# Altium PCB 5602_PCB_SHEET.PcbDoc (part 1 of 2)
Units mm, origin at the board's own origin, x right, y up, seen from the top; angles counter-clockwise.
Board outline 104.86 x 35.66 mm, 2 copper layers (Top Layer, Bottom Layer); 111 components, 84 nets, 367 pads, 137 vias.
Unrouted connection lines stored in the file: 5.
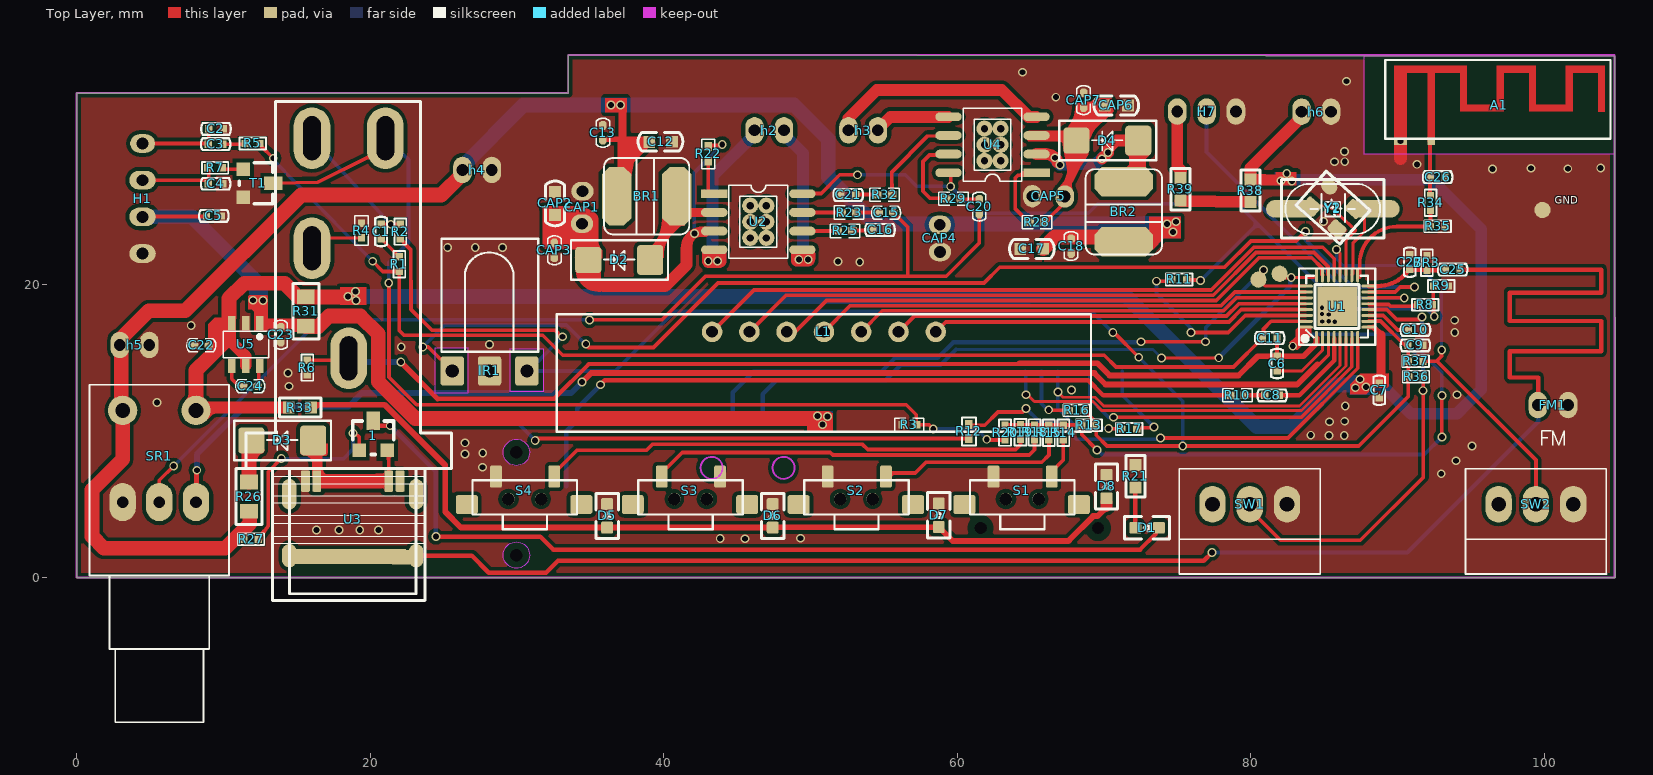
[diagram p0: Top Layer view]
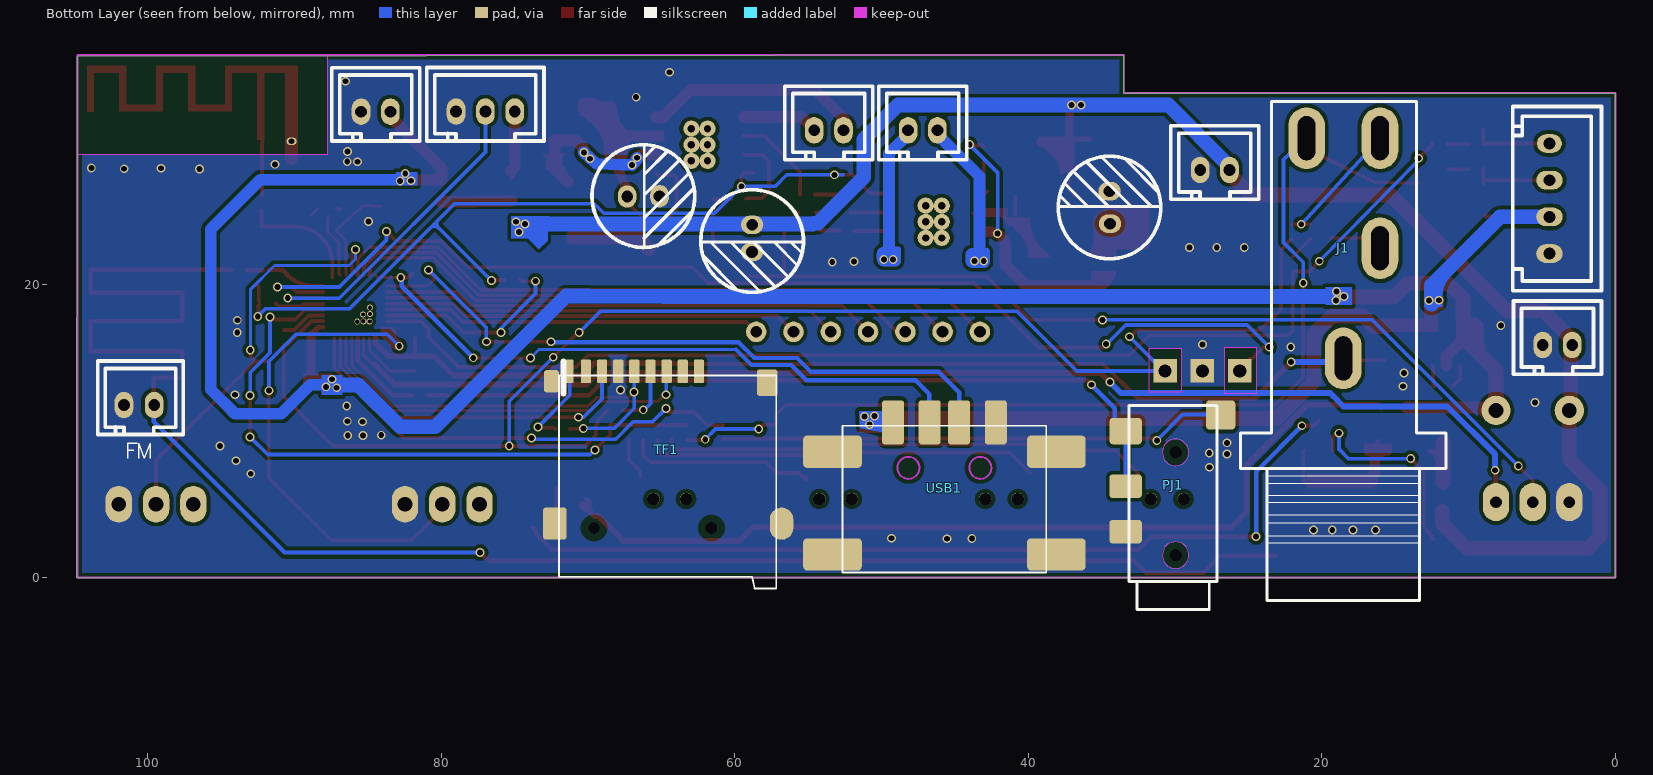
[diagram p1: Bottom Layer view, seen from below]

## Layer stack, top to bottom
Top Solder: solder mask 0.0102, Solder Resist, Dk 3.5
Top Layer: signal copper 0.0356
Dielectric 1: dielectric 0.32, FR-4, Dk 4.8
Bottom Layer: signal copper 0.0356
Bottom Solder: solder mask 0.0102, Solder Resist, Dk 3.5

## Board outline
0,0 104.86,0 104.809,35.557 33.507,35.661 33.507,33.037 0,33.037

## Design rules (kind name [scope] priority, off if disabled: settings)
Clearance [All] p1: gap=0.254 ignorepadtopadclearanceinfootprint=FALSE except(0: Arc-Hole Track-Hole SMDPad-Hole THPad-Hole Via-Hole Fill-Hole Poly-Hole Region-Hole Text-Hole; 0.1: Arc-Arc Arc-Track Arc-SMDPad Arc-Via Track-Track Track-SMDPad Track-Via SMDPad-SMDPad; 0.5: Arc-Text Track-Text)
PolygonConnect [All] p1: connectstyle=Direct reliefconductorwidth=0.254 reliefentries=4 polygonreliefangle="90 Angle" airgapwidth=0.254
RoutingVias [All] p1: holewidth=0.711 width=1.27 viastyle="Through Hole" minholewidth=0.711 minwidth=1.27 maxholewidth=0.711 maxwidth=1.27
SolderMaskExpansion [All] p1: expansion=0.102
Width [All] p1: maxlimit=0.254 minlimit=0.1 preferedwidth=0.2
30 further rules are at their usual default settings.

## Classes and differential pairs
component class Sheet3: h6 H7 IR1 R36 R37 R38 R39 SW1 SW2
component class Sheet1: C1 C2 C3 C4 C5 C6 C7 C8 C9 C10 C11 H1 J1 L1 PJ1 R1 R2 R3 R4 R5 R6 R7 R8 R9 R10 R11 R12 R13 R14 R15 R16 R17 R18 R19 R20 S1 S2 S3 S4 T1 TF1 U1 USB1
component class AC5602: 1 A1 BR1 BR2 BR3 C12 C13 C15 C16 C17 C18 C20 C21 C22 C23 C24 C25 C26 C27 CAP1 CAP2 CAP3 CAP4 CAP5 CAP6 CAP7 D1 D2 D3 D4 D5 D6 D7 D8 FM1 h2 h3 h4 h5 R21 R22 R23 R25 R26 R27 R28 R29 R31 R32 R33 R34 R35 SR1 U2 U3 U4 U5 Y1 Y2

## Components (designator, comment, footprint, x,y, rotation, side; value= is the part's Value field where it differs from the comment)
1 "TRANSISTOR2" TRANSISOTR 19.308,8.678 r90 top
A1 "BT_antenna" Antenna 90.215,29.831 r0 top
BR1 "3R3" 3R3 40.926,26.285 r180 top
BR2 "3R3" 3R3 71.083,27.02 r270 top
BR3 "180nH" IND_180NH 92.013,20.974 r90 top
C1 "220nF" "CAP 220NF" 20.8,23.579 r90 top
C2 "10nf" "CAP 10NF" 9.5,30.6 r180 top
C3 "220nF" "CAP 220NF" 9.5,29.6 r180 top
C4 "100nF" "CAP 220NF" 9.5,26.9 r180 top
C5 "1uF" "CAPM 1UF" 9.331,24.621 r0 top
C6 "1uF" "CAP 10nF" 81.805,14.607 r90 top
C7 "1uF" "CAP 10nF" 88.765,12.785 r270 top
C8 "1uF" "CAPM 1UF" 81.494,12.485 r180 top
C9 "1uF" "CAP 10nF" 91.225,15.849 r180 top
C10 "1uF" "CAP 10nF" 91.23,16.894 r180 top
C11 "10uF" "CAP 10nF" 81.3,16.335 r180 top
C12 "10uf" CAPB_10UF 40.573,29.722 r180 top
C13 "10uF" "CAP 10UF" 35.864,30.343 r270 top
C15 "100nF" "cap or" 55.153,24.88 r0 top
C16 "100nF" "CAP 100NF" 54.726,23.674 r0 top
C17 "10uf" CAPB_10UF 64.31,22.411 r0 top
C18 "10uF" "CAP 10UF" 67.767,22.607 r90 top
C20 "100nF" "cap or" 61.509,25.312 r270 top
C21 "100nF" "CAP 100NF" 52.607,26.144 r180 top
C22 "10uF" "CAP 10UF" 8.5,15.841 r0 top
C23 "10uF" "CAP 10UF" 13.924,16.562 r90 top
C24 "10uF" "CAP 10UF" 11.829,13.065 r0 top
C25 "56pF" "CAPM 1UF" 93.747,20.966 r0 top
C26 "NC" "CAP 10NF" 92.742,27.302 r180 top
C27 "NC" "CAP 10NF" 90.844,21.514 r270 top
CAP1 "CAP_470uF" CAP_10V 34.468,26.348 r270 top
CAP2 "10uF" CAPL_10uF 32.605,26.303 r270 top
CAP3 "1uF" CAPL_1uF 32.596,21.763 r90 top
CAP4 "CAP_470uF" CAP_16V 58.825,23.934 r0 top
CAP5 "CAP_470uF" CAP_10V 65.134,26.012 r0 top
CAP6 "10uF" CAPL_10uF 71.637,32.189 r180 top
CAP7 "1uF" CAPL_1uF 68.584,33.12 r270 top
D1 "RED LED" LED 72.949,3.415 r180 top
D2 "SS54" DIODE/SS54 34.765,21.557 r0 top
D3 "SS54" DIODE/SS54 11.805,9.262 r0 top
D4 "SS54" DIODE/SS54 68.024,29.695 r0 top
D5 "LED" LED 36.153,4.226 r90 top
D6 "LED" LED 47.436,4.226 r90 top
D7 "LED" LED 58.752,4.272 r90 top
D8 "LED" LED 70.181,6.229 r90 top
FM1 "FM" FM 99.568,11.775 r0 top
H1 "HEADER" HEADER4 4.5,29.6 r0 top
h2 "HEADER/2mm" HEADER2 46.2,30.5 r0 top
h3 "HEADER/2mm" HEADER2 52.6,30.5 r0 top
h4 "HEADER/2mm" HEADER2 26.3,27.8 r0 top
h5 "HEADER/2mm" HEADER2 2.953,15.875 r0 top
h6 "HEADER/2mm" Header2 83.473,31.768 r0 top
H7 "HEADER" HEADER3 75.001,31.773 r0 top
IR1 "IR sensor" "IR SENSOR" 28.14,14.1 r0 top
J1 "MIC Jack" MIC 21.044,29.961 r180 bottom
L1 "LED_DISPLAY_3308" LED_DISPLAY_3308 56.007,16.764 r0 top
PJ1 "AUX Jack" AUX 33.373,6.251 r0 bottom
R1 "4.7K" R_4.7K 21.994,21.381 r90 top
R2 "22K" R_22K 22.064,23.598 r270 top
R3 "NC" R_NC 56.743,10.444 r0 top
R4 "NC" R_NC 19.418,23.671 r270 top
R5 "4.7K" R_4.7K 12,29.6 r180 top
R6 "0R" R_0 15.73,14.332 r90 top
R7 "6k8" R_22K 9.439,27.937 r180 top
R8 "91K" R_22K 91.897,18.617 r0 top
R9 "68K" R_22K 92.985,19.894 r180 top
R10 "10K" R_10K 79.096,12.442 r0 top
R11 "3K3" R_100K 75.64,20.334 r180 top
R12 "1K" "R_1K SECOND" 60.815,9.523 r90 top
R13 "22K" R_22K 68.982,10.399 r180 top
R14 "0R" R_0 67.238,9.893 r270 top
R15 "27K" R_27K 66.255,9.399 r90 top
R16 "4.7K" R_4.7K 68.162,11.412 r180 top
R17 "3K3" R_100K 72.233,10.149 r180 top
R18 "6K2" R_6K2 65.278,9.415 r90 top
R19 "3K3" R_100K 64.317,9.428 r90 top
R20 "100K" R_100K 63.266,9.401 r90 top
R21 "1K" R_1K 72.155,6.917 r270 top
R22 "820K" R_820K 43.176,29.515 r270 top
R23 "10K" R_10K 52.636,24.891 r180 top
R25 "10K" R_10K 52.364,23.641 r180 top
R26 "1R" R_1R 11.75,4.534 r90 top
R27 "22K" R_22K 11.891,2.63 r0 top
R28 "820K" R_820K 66.06,24.108 r180 top
R29 "10K" R_10K 59.751,25.828 r180 top
R31 "1R" R_1R 15.628,17.153 r90 top
R32 "10K" R_10K 55.058,26.117 r0 top
R33 "1K" R_1K 15.22,11.602 r180 top
R34 "2.7P" R_2.7P 92.262,25.053 r90 top
R35 "NC" RES_NC 92.256,23.949 r0 top
R36 "4.7K" R_22K 91.271,13.711 r0 top
R37 "4.7K" R_22K 91.249,14.769 r180 top
R38 "22K" R_22R 79.861,25.619 r90 top
R39 "22K" R_22R 75.346,27.247 r270 top
S1 "Teak switch" "TEAK SWITCH" 64.4,5.95 r180 top
S2 "Teak switch" "TEAK SWITCH" 53.1,5.95 r180 top
S3 "Teak switch" "TEAK SWITCH" 41.8,5.95 r180 top
S4 "Teak switch" "TEAK SWITCH" 30.5,5.95 r180 top
SR1 "B50" VR50K 5.64,5.162 r0 top
SW1 "B50KS" VR2/50K 79.94,5.02 r0 top
SW2 "B50KS" VR2/50K 99.44,5.02 r0 top
T1 "Transistor" TRANSISOTR 11.36,27.811 r0 top
TF1 "TF" "SD CARD" 61.6,3.4 r0 bottom
U1 "AC6966" AC6966 86.8,18.5 r90 top
U2 "XA9812B" XA9812B 45.906,25.366 r0 top
U3 "USB -C" "USB C" 18.673,2.936 r0 top
U4 "XA9812B" XA9812B 62.965,28.414 r180 top
U5 "ic4004" IC4004 11.47,16.091 r0 top
USB1 "USB A" "USB A" 53.35,1.6 r0 bottom
Y1 "24MHz" OSC 85.6,25.148 r180 top
Y2 "24MHz" OSC1 85.617,25.223 r180 top

## Footprints (in the part's own frame and the unit in brackets; to place one, negate y for a bottom-side part, rotate by r counter-clockwise, add the part's x,y. Pads: shape width x height; smd on the part's side, far side on the other; paste and mask are expansions set on the pad)
3R3 [mm] "3R3 INDUCTOR"
  oct 2x4 smd paste-2539.97 mask+0.02: 1(0.026,0.275)
  oct 2x4 smd paste+0 mask+0.02: 2(4.126,0.275)
  silkscreen extent -0.82,-2.33 4.98,2.88
AC6966 [mm] "AC6966 MPU"
  rect 2.7x2.7 smd paste+0 mask+0.102: 0(0,0.889)
  oval 1x0.2 smd paste+0 mask+0.102: 1(-2.168,2.306) 2(-2.168,1.906) 3(-2.168,1.506) 4(-2.168,1.107) 5(-2.168,0.706) 6(-2.168,0.306) 7(-2.168,-0.094) 8(-2.168,-0.494) 17(2.132,-0.494) 18(2.132,-0.094) 19(2.132,0.306) 20(2.132,0.706) 21(2.132,1.107) 22(2.132,1.506) 23(2.132,1.906) 24(2.132,2.306)
  oval 0.2x1 smd paste+0 mask+0.102: 9(-1.418,-1.244) 10(-1.018,-1.244) 11(-0.618,-1.244) 12(-0.218,-1.244) 13(0.182,-1.244) 14(0.582,-1.244) 15(0.982,-1.244) 16(1.382,-1.244) 25(1.382,3.056) 26(0.982,3.056) 27(0.582,3.056) 28(0.182,3.056) 29(-0.218,3.056) 30(-0.618,3.056) 31(-1.018,3.056) 32(-1.418,3.056)
  silkscreen extent -2.62,-1.69 2.58,3.51
Antenna [mm]
  rect 0.5x0.5 smd mask+0.003: 1(2.089,-0.077)
  oval 0.7x0.5 hole 0.4 mask+0.01: 2(-0.011,-0.077)
  rect 0.9x0.5 smd mask+0.003: 2(-0.011,-0.077)
  rect 0.9x0.5 on Top Solder mask+0.003: 2(-0.011,-0.077)
  rect 0.5x0.5 on Top Solder mask+0: ""(-0.211,4.823)
  rect 0.5x0.5 on Top Solder mask+0.003: ""(2.089,-0.077) ""(2.089,4.323) ""(4.289,2.183) ""(4.289,4.823) ""(6.789,4.823) ""(6.789,2.183) ""(8.989,2.183) ""(8.989,4.823) ""(11.489,2.183) ""(11.489,4.823) ""(13.689,0.883) ""(13.689,4.823)
  Top Layer region: 9.239,1.933 9.239,5.073 8.739,5.073 8.739,1.933
  Top Layer region: 9.239,4.573 9.239,5.073 6.538,5.073 6.538,4.573
  Top Layer region: 7.039,1.933 7.039,5.073 6.538,5.073 6.538,1.933
  Top Layer region: 7.04,1.933 7.04,2.433 4.039,2.433 4.039,1.933
  Top Layer region: 0.44,-0.326 0.44,5.074 -0.459,5.074 -0.459,-0.326
  Top Layer region: 2.339,0.016 2.339,4.823 1.838,4.823 1.838,0.016
  Top Layer region: 4.539,1.934 4.539,5.074 4.039,5.074 4.039,1.934
  Top Layer region: 11.74,1.933 11.74,5.073 11.24,5.073 11.24,1.933
  Top Layer region: 9.038,2.433 9.038,1.933 11.739,1.933 11.739,2.433
  Top Layer region: 13.939,4.574 13.939,5.074 11.239,5.074 11.239,4.574
  Top Layer region: 13.939,1.905 13.939,5.073 13.439,5.073 13.439,1.905
  Top Layer lines w0.5: -0.211,4.823 -0.009,4.823 4.289,4.823 ; 4.289,4.823 4.289,4.823 ; 4.289,4.823 4.289,4.823
  Keep-Out Layer pour cut-out: -2.473,5.75 14.605,5.75 14.605,-0.94 14.579,-0.965 -2.464,-0.965 -2.464,5.74
  silkscreen extent -1.04,0.1 14.31,5.45
AUX [mm] "AUX, 3.5MM"
  round 0.2 hole 0.85 unplated: 0(-3.4,-2.3) 0(-3.4,4.7)
  rrect25% 2.2x1.6 smd: 1(0,0) 4(0,3.1)
  rrect25% 2.2x1.8 smd: 2(0,-3.75)
  rrect25% 2x2 smd: 3(-6.473,-4.849)
  Keep-Out Layer pour cut-out: -4.3,-2.3 -4.231,-2.644 -4.036,-2.936 -3.744,-3.131 -3.4,-3.2 -3.4,-3.2 -3.056,-3.131 -2.764,-2.936 -2.569,-2.644 -2.5,-2.3 -2.5,-2.3 -2.569,-1.956 -2.764,-1.664 -3.056,-1.469 -3.4,-1.4 -3.4,-1.4 -3.744,-1.469 -4.036,-1.664 -4.231,-1.956 -4.3,-2.3
  Keep-Out Layer pour cut-out: -4.3,4.7 -4.231,4.356 -4.036,4.064 -3.744,3.869 -3.4,3.8 -3.4,3.8 -3.056,3.869 -2.764,4.064 -2.569,4.356 -2.5,4.7 -2.5,4.7 -2.569,5.044 -2.764,5.336 -3.056,5.531 -3.4,5.6 -3.4,5.6 -3.744,5.531 -4.036,5.336 -4.231,5.044 -4.3,4.7
  silkscreen extent -6.24,-5.5 -0.24,8.4
"CAP 10NF" [mm] "10nF SMD Capacitor"
  rect 0.5x0.5 smd paste+0 mask+0.102: 1(-0.5,0) 2(0.5,0)
  silkscreen extent -1.01,-0.4 1,0.4
"CAP 10nF" [mm] "10nF SMD Capacitor"
  rect 0.5x0.5 smd paste+0 mask+0.102: 1(-0.5,0) 2(0.5,0)
  silkscreen extent -1.01,-0.4 1,0.4
"CAP 10UF" [mm] "10uF SMD Capacitor"
  oct 0.6x0.51 smd paste+0 mask+0.102: 1(-0.492,0.003) 2(0.508,0.003)
  silkscreen extent -0.98,-0.45 0.99,0.45
"CAP 100NF" [mm] "100nF SMD Capcitor"
  rect 0.5x0.5 smd paste+0 mask+0.102: 1(-0.476,0.044) 2(0.524,0.044)
  silkscreen extent -0.98,-0.36 1.03,0.44
"CAP 220NF" [mm] "220nF Capacitor"
  rect 0.5x0.5 smd paste+0 mask+0.102: 1(-0.476,0.044) 2(0.524,0.044)
  silkscreen extent -0.98,-0.36 1.03,0.44
"cap or" [mm]
  oct 0.6x0.51 smd paste+0 mask+0.102: 1(-0.492,0.003) 2(0.508,0.003)
  silkscreen extent -0.98,-0.45 0.99,0.45
CAP_10V [mil]
  oval 50x60 hole 31.5 mask+4: 1(0,0) 2(87,-1.06)
CAP_16V [mil]
  oval 60x50 hole 31.5 mask+4: 1(0,5) 2(0.31,-67.86)
CAPB_10UF [mm] "CAPB 10UF"
  rect 0.8x0.8 smd: 1(0,0) 2(1.557,0.021)
  silkscreen extent -0.74,-0.64 2.31,0.64
CAPL_1uF [mm]
  oct 0.6x0.51 smd paste+0 mask+0.102: 1(0.062,0.034) 2(1.063,0.034)
  silkscreen extent -0.42,-0.42 1.55,0.48
CAPL_10uF [mil]
  rect 32x32 smd paste+0 mask+4: 1(0,0) 2(62,0)
  silkscreen extent -29,-25 91,25
"CAPM 1UF" [mm] "1uF SMD Capacitor mc"
  rect 0.5x0.5 smd paste+0 mask+0.102: 1(-0.476,0.044) 2(0.524,0.044)
  silkscreen extent -0.98,-0.36 1.03,0.44
DIODE/SS54 [mil]
  rrect25% 70x70 smd: 1(4.12,4.12)
  rrect25% 70x80 smd: 2(170.11,4.12)
  silkscreen extent -42,-49 218,57
FM [mil] "FM"
  oval 50x70.87 hole 31.5 mask+4: 1(0,0) 2(81.1,0)
  silkscreen extent 11,-108 71,-68
HEADER2 [mil]
  oval 50x70.87 hole 31.5 mask+4: 1(0,0) 2(78.74,0)
Header2 [mil]
  oval 50x70.87 hole 31.5 mask+4: 1(0,0) 2(78.74,0)
HEADER3 [mil]
  oval 50x70.87 hole 31.5 mask+4: 1(157.48,0) 2(78.74,0) 3(0,0)
HEADER4 [mil] "2.5mm"
  oval 66.93x50 hole 31.5: 1(0,0)
  oval 70.87x50 hole 31.5: 2(0,-98.42) 3(0,-196.86) 4(0,-295.27)
IC4004 [mm] "ic4004"
  rect 0.5x1 smd paste+0 mask+0.102: 1(-0.889,1.27) 2(0.061,1.27) 3(1.011,1.27) 4(-0.889,-1.63) 5(0.061,-1.63) 6(1.011,-1.63)
  silkscreen extent -1.49,-1.08 1.61,0.72
IND_180NH [mm] "180nH Inductor"
  rect 0.5x0.5 smd: 1(0,0) 2(1,0)
  silkscreen extent -0.4,-0.4 1.4,0.4
"IR SENSOR" [mm]
  rrect25% 1.6x2 / inner round 1.524 / far side rrect0% 1.6x1.6 hole 0.889: 1(-2.54,0) 2(0,0) 3(2.54,0)
  Keep-Out Layer pour cut-out: 1.41,1.5 3.67,1.5 3.67,-1.43 1.41,-1.43 1.41,1.5
  Keep-Out Layer pour cut-out: -3.71,1.57 -1.47,1.57 -1.47,-1.53 -3.71,-1.53 -3.71,1.57
  silkscreen extent -3.27,1.31 3.33,9.01
LED [mil]
  rrect25% 32x32 smd: 1(-31.5,0) 2(31.5,0)
  silkscreen extent -61,-30 61,30
LED_DISPLAY_3308 [mil]
  round 55.12 hole 31.5 mask+4: 1(-500,0) 2(-400,0) 3(-300,0) 4(-200,0) 5(-100,0) 6(0,0) 7(100,0)
  silkscreen extent -917,-268 517,47
MIC [mm]
  oval 2.5x4.2 hole 1.2 slot 3 at 90 deg: 1(5,0) 2(0,0) 3(5,-7.5) 4(2.5,-15)
  silkscreen extent -4.5,-31.51 9.5,2.5
OSC [mm]
  oval 3.5x1.2 smd: 1(-2.8,0) 2(2.8,0)
  silkscreen extent -3.5,-2 3.5,2
OSC1 [mil]
  rrect25% 45x38 smd rot 138.37 mask+1.12: 1(-57.38,3.6) 3(57.38,-3.6)
  oval 45x38 smd rot 138.37 mask+1.12: 2(10.3,-56.56)
  rrect50% 45x38 smd rot 138.37 mask+1.12: 4(-10.3,56.56)
  silkscreen extent -99,-98 99,98
R_0 [mm] "0R SMD Resistance"
  rect 0.5x0.5 smd paste+0 mask+0.102: 1(-0.5,0) 2(0.5,0)
  silkscreen extent -0.9,-0.4 0.9,0.4
R_1K [mil] "1K SMD Resistance"
  rect 32x32 smd paste+0 mask+4: 1(-30,0) 2(30,0)
  silkscreen extent -56,-26 55,26
"R_1K SECOND" [mm]
  rect 0.6x0.51 smd paste+0 mask+0.102: 1(-0.022,0.012) 2(0.928,0.012)
  silkscreen extent -0.5,-0.47 1.4,0.49
R_1R [mm]
  rect 1x1.2 smd paste+0 mask+0.102: 1(0,0) 2(2,0)
  silkscreen extent -0.89,-0.89 2.92,0.89
R_2.7P [mm] "2.7P SMD Resistance"
  rect 0.5x0.5 smd paste+0 mask+0.102: 1(0,0) 2(1,0)
  silkscreen extent -0.4,-0.4 1.4,0.4
R_4.7K [mm] "4.7K SMD Resistance3"
  rect 0.5x0.5 smd paste+0 mask+0.102: 1(-0.5,0) 2(0.5,0)
  silkscreen extent -0.9,-0.4 0.9,0.4
R_6K2 [mm] "6K2 SMD Resistance"
  rect 0.5x0.5 smd paste+0 mask+0.102: 1(0,0) 2(1,0)
  silkscreen extent -0.4,-0.4 1.4,0.4
R_10K [mm] "10K SMD Resistance"
  rect 0.6x0.51 smd paste+0 mask+0.102: 1(-0.5,0) 2(0.5,0)
  silkscreen extent -1,-0.45 1,0.45
R_22K [mm] "22K SMD Resistance"
  rect 0.5x0.5 smd paste+0 mask+0.102: 1(-0.5,0) 2(0.5,0)
  silkscreen extent -0.9,-0.4 0.9,0.4
R_22R [mil] "22R SMD Resistence"
  rect 32x32 smd paste+0 mask+4: 1(0,-5) 2(60,-5)
  silkscreen extent -25,-31 86,21
R_27K [mm] "27K SMD Resistance"
  rect 0.5x0.5 smd paste+0 mask+0.102: 1(0,0) 2(1,0)
  silkscreen extent -0.4,-0.4 1.4,0.4
R_100K [mm] "100K SMD Resistance"
  rect 0.5x0.5 smd paste+0 mask+0.102: 1(0,0) 2(1,0)
  silkscreen extent -0.4,-0.4 1.4,0.4
R_820K [mil] "820K SMD Resistance"
  rect 23.62x20.08 smd paste+0 mask+4: 1(5,-5) 2(44.38,-5)
  silkscreen extent -15,-23 64,13
R_NC [mm] "NC 1mm"
  rect 0.5x0.5 smd paste+0 mask+0.102: 1(-0.5,0) 2(0.5,0)
  silkscreen extent -1,-0.45 1,0.45
RES_NC [mm] "RESISTOR nc 1MM"
  rect 0.5x0.5 smd paste+0 mask+0.102: 1(0,0) 2(1,0)
  silkscreen extent -0.4,-0.4 1.4,0.4
"SD CARD" [mm]
  round 0.5 hole 0.85 unplated: 0(0,0) 0(8.001,0)
  rrect25% 0.7x1.6 smd: 1(0.852,-10.668) 2(1.953,-10.666) 3(3.052,-10.668) 4(4.152,-10.668) 5(5.252,-10.668) 6(6.352,-10.668) 7(7.452,-10.668) 8(8.552,-10.668)
  rrect25% 0.5x1.6 smd: 9(9.652,-10.668)
  rrect25% 1x1.5 smd: 10(10.9,-10)
  rrect25% 1.6x2.2 smd: 13(10.672,-0.3)
  oval 1.6x2.2 smd: 14(-4.778,-0.3)
  rrect25% 1.4x1.8 smd: 15(-3.8,-9.9)
  Top Layer pour cut-out: 7.101,0 7.17,-0.344 7.365,-0.636 7.657,-0.831 8.001,-0.9 8.001,-0.9 8.345,-0.831 8.637,-0.636 8.833,-0.344 8.901,0 8.901,0 8.833,0.344 8.637,0.636 8.345,0.831 8.001,0.9 8.001,0.9 7.657,0.831 7.365,0.636 7.17,0.344 7.101,0
  Top Layer pour cut-out: -0.9,0 -0.831,-0.344 -0.636,-0.636 -0.344,-0.831 0,-0.9 0,-0.9 0.344,-0.831 0.636,-0.636 0.831,-0.344 0.9,0 0.9,0 0.831,0.344 0.636,0.636 0.344,0.831 0,0.9 0,0.9 -0.344,0.831 -0.636,0.636 -0.831,0.344 -0.9,0
  Bottom Layer pour cut-out: -0.9,0 -0.831,-0.344 -0.636,-0.636 -0.344,-0.831 0,-0.9 0,-0.9 0.344,-0.831 0.636,-0.636 0.831,-0.344 0.9,0 0.9,0 0.831,0.344 0.636,0.636 0.344,0.831 0,0.9 0,0.9 -0.344,0.831 -0.636,0.636 -0.831,0.344 -0.9,0
  Bottom Layer pour cut-out: 7.101,0 7.17,-0.344 7.365,-0.636 7.657,-0.831 8.001,-0.9 8.001,-0.9 8.345,-0.831 8.637,-0.636 8.833,-0.344 8.901,0 8.901,0 8.833,0.344 8.637,0.636 8.345,0.831 8.001,0.9 8.001,0.9 7.657,0.831 7.365,0.636 7.17,0.344 7.101,0
  silkscreen extent -4.42,-11.35 10.38,4.12
"TEAK SWITCH" [mm]
  round 0.85 hole 0.85 unplated: 0(-1.15,0.575) 0(1.07,0.575)
  rrect25% 0.8x1.5 smd: 1(-2.05,-0.95) 2(1.92,-0.95)
  rrect25% 1.5x1.3 smd: 3(3.9,0.95) 4(-3.9,0.95)
  silkscreen extent -3.6,-0.7 3.52,2.64
TRANSISOTR [mil] "1AM"
  rect 36x36 smd paste+0 mask+4: 1(0.32,1.63) 2(0.32,-73.37)
  rect 50x36 smd paste+0 mask+4: 3(80.32,-35.87)
  Top Layer lines w11.81: 0.32,1.63 0.3,1.61
  silkscreen extent -11,-91 79,19
"USB A" [mm]
  rrect25% 1.5x3 smd: 1(-11.125,-9) 2(-8.625,-9) 3(-6.625,-9) 4(-4.125,-9)
  rrect25% 4x2.2 smd: 5(-15.25,-7) 6(0,-7) 7(-15.25,0) 8(0,0)
  Keep-Out Layer circle w0.127: c-10.075,-5.9 r0.75
  Keep-Out Layer circle w0.127: c-5.175,-5.9 r0.75
  silkscreen extent -14.56,-8.77 -0.69,1.23
"USB C" [mm] "C?"
  rrect25% 0.6x1.45 smd paste+0 mask+0.05: 1(-3.078,3.659) 2(-2.303,3.659) 3(2.597,3.659) 4(3.372,3.659)
  oval 1x2.1 smd paste-1.05 mask+0.102: 5(-4.173,2.764) 7(4.467,2.764)
  oval 1x1.6 smd paste-0.8 mask+0.102: 6(-4.173,-1.416) 8(4.467,-1.416)
  rect 7.5x1 smd: 9(0.014,-1.473)
  rect 1.3x1 smd paste-0.65 mask+0.214: 10(-3.551,-1.498) 11(3.46,-1.538)
  silkscreen extent -4.17,-4.02 4.47,4.39
VR2/50K [mm]
  oval 1.8x2.5 hole 1: 1(-2.54,0) 2(0,0) 3(2.54,0)
  silkscreen extent -4.8,-4.76 4.8,2.42
VR50K [mm]
  round 2 hole 1: 1(-2.5,6.25) 2(2.5,6.25)
  oval 1.8x2.6 hole 0.8: 3(-2.5,0) 4(0,0) 5(2.5,0)
  silkscreen extent -4.75,-15 4.75,8
XA9812B [mm]
  round 1.1 hole 0.5 mask+0.102: 0(0,-2.2) 0(0,-1.1) 0(0,0) 0(1.1,-2.2) 0(1.1,-1.1) 0(1.1,0)
  rect 1.8x0.6 smd paste-0.9 mask-0.036: 1(-2.45,0.805)
  oval 1.8x0.6 smd paste-0.9 mask-0.036: 2(-2.45,-0.465) 3(-2.45,-1.735) 4(-2.45,-3.005) 5(3.55,-3.005) 6(3.55,-1.735) 7(3.55,-0.465) 8(3.55,0.805)
  silkscreen extent -1.45,-3.6 2.55,1.4

## Part data
BR1 BR2: library part IND_2, "3R3 SMD Inductor", Category=Inductors
BR3: library part IND_1, "180nH SMD Inductor", Category=Inductors
C1 C3: library part CAP_2, "220nf SMD Capcitor"
C2: library part CAP_1, "10nf SMD Capcitor"
C4 C15 C16 C20 C21: library part CAP_3, "100nf SMD Capcitor"
C5 C6 C7 C8 C9 C10 C25: library part CAP_4, "1uF SMD Capcitor"
C11 C13 C18 C22 C23 C24: library part CAP_5, "10uF SMD Capcitor"
C12 C17: library part CAP_7B, "10uf SMD Capcitor"
C26 C27: library part CAP_6
CAP1 CAP5: library part CAP_10V
CAP2 CAP6: library part CAPL_10uF
CAP3 CAP7: library part CAPL_1uF_1
CAP4: library part CAP_16V
D1: library part LED, "LED"
D2 D3 D4: library part Diode, "Diode//SS54"
H1: "4PIN HEADER"
h2 h3 h4 h5 h6: "2pin / 2mm"
H7: library part HEADER/3PIN, "HEADER 2MM 3PIN"
IR1: library part "IR Sensor"
J1: library part MIC
L1: library part DISPLAY, "LED_DISPLAY/3308"
PJ1: library part "JACK 3.5MM", "AUX Jack, 3.5mm"
R1 R5 R16 R36 R37: library part RES_1, "4.7K SMD Resistance"
R2: library part RES, "22K SMD Resistance"
R3 R4: library part RES_3
R6 R14: library part RES_4, "0R SMD Resistance"
R7: library part RES_2, "6k8 SMD Resistance"
R8: library part RES_18, "91K SMD Resistance"
R9: library part RES_17, "68K SMD Resistance"
R10 R23 R25 R29 R32: library part RES_11, "10K, SMD Resistance / 1% / 125mW / VISHAY", Category=Resistors
R11 R17 R19: library part RES_7, "3K3, SMD Resistance / 1% / 125mW / VISHAY", Category=Resistors
R12 R21 R33: library part RES_5, "1K, SMD Resistance / 1% / 125mW / VISHAY", Category=Resistors
R13: library part RES_10, "22K, SMD Resistance / 1% / 125mW / VISHAY", Category=Resistors
R15: library part RES_9, "27K, SMD Resistance / 1% / 125mW / VISHAY", Category=Resistors
R18: library part RES_8, "6K2, SMD Resistance / 1% / 125mW / VISHAY", Category=Resistors
R20: library part RES_6, "100K, SMD Resistance / 1% / 125mW / VISHAY", Category=Resistors
R22 R28: library part RES_12, "820K SMD Resistance"
R26 R31: library part RES_13, "1R SMD Resistance"
R27: library part RES_16, "1K SECOND SMD Resistance"
R34: library part RES_14, "2.7P SMD Resistance"
R35: library part RES_NC, "RESISTOR 1MM NC"
R38 R39: library part RES_15, "22R SMD Resistance"
S1 S2 S3 S4: library part Switch, "Teak Switch"
SR1: library part B50K, "B50 ROLLING SWITCH"
T1: "1AM"
TF1: library part "TF card", "TF Card, SD Card"
U2 U4: library part IC-XA9812B, "IC-XA9812B"
U5: library part IC4004
USB1: library part USB
Y1: library part OSC, "Crystal Oscillator", Category=Oscillators
Y2: library part "OSC SMD", "Crystal Oscillator, SMD", Category=Oscillators

## Free pads (board coordinates)
  round 1.1 smd paste+0 mask+0.102: 1(80.531,20.318) 1(81.979,20.725) 1(99.887,25.07)

## Via types
v1: diameter 0.6, hole 0.4, Top Layer to Bottom Layer, tented both sides, 131 vias
v2: diameter 0.4, hole 0.3, Top Layer to Bottom Layer, tented both sides, 6 vias

## Nets (pads, with @x,y where several pads share a name; then routed paths per layer and width w, separated by ;. In a path a pad name is that pad's centre, name@x,y a point inside that pad or via, vN(x,y) a via of type N, cw(c..) or ccw(c..) an arc to the next point about the centre after c; other vN are vias at no path point)
3V3: C9.2 IR1.3 R2.2 R13.1 R16.1 R36.1 R37.2 U1.10 | length 103.4
  Top Layer w0.254: R2.2@22.064,23.098 22.78,22.337 22.785,18.298 24.2,16.883 32.601,16.883 33.052,16.432 v1(33.113,16.432) ; R16.1@68.662,11.412 69.359,10.715 69.359,10.522 R13.1@69.482,10.399 69.482,9.719 70.208,8.993 87.374,8.993 90.748,12.367 R36.1@90.748,13.734 ; v1(70.61,16.718) 70.697,16.718 v1(72.382,15.034) ; U1.10@88.071,17.509 88.847,17.509 90.507,15.849 C9.2@90.725,15.849 90.748,15.826 R36.1@90.748,13.734 ; R36.1@90.771,13.711 R36.1@90.748,13.734
  Bottom Layer w0.254: v1(33.113,16.432) 32.448,15.768 30.799,14.101 IR1.3@30.68,14.1 36.712,14.1 40.786,18.174 69.155,18.174 v1(70.61,16.718) ; v1(72.382,15.034) 75.373,12.042 v1(75.373,8.98)
3V3-SD: R16.2 TF1.4 | length 4.3
  Top Layer w0.254: v1(66.247,11.453) v1@66.268,11.432 ; v1@66.289,11.412 v1@66.268,11.432 ; R16.2@67.662,11.412 67.641,11.432 v1@66.268,11.432
  Bottom Layer w0.254: TF1.4@65.752,14.068 65.752,11.862 66.161,11.453 v1(66.247,11.453)
5V: C5.1 C23.2 H1.3 R31.1 U5.3 USB1.4 | length 58.6
  Top Layer w0.254: H1.3@4.5,24.6 4.533,24.632 8.822,24.632 C5.1@8.855,24.665 ; U5.3@12.604,17.221 13.921,17.221 R31.1@15.349,17.221
  Top Layer w1: R31.1@15.63,17.134 16.489,17.134 17.199,17.844 19.344,17.844 20.563,16.626 20.563,13.378 23.079,10.862 50.755,10.862
  Bottom Layer w1: H1.3@4.5,24.6 7.862,24.6 12.531,19.931 12.531,18.657
  other v1: 50.828,10.441 51.176,11.008 50.495,11.03 12.712,18.903 12.034,18.919
AD1: R37.1 SW2.2 U1.20 | length 28.9
  Top Layer w0.2: v1(85.855,22.372) 86.094,22.133 U1.20@86.094,20.632
  Top Layer w0.254: R37.1@91.749,14.769 92.672,14.769 ; v1@93.007,15.314 93.007,15.104 92.687,14.784 99.44,8.031 SW2.2@99.44,5.02 ; v1(93.026,15.522) v1@93.092,15.456
  Bottom Layer w0.2: v1(85.855,22.372) 85.855,21.727 86.287,21.295 91.363,21.295 93.018,19.64 v1@93.018,15.522
AD2: R36.2 SW1.2 U1.32 | length 33.7
  Top Layer w0.254: SW1.2@79.94,5.02 79.94,4.67 82.045,2.565 87.477,2.565 91.771,6.859 R36.2@91.771,13.711
  Bottom Layer w0.254: v1(82.872,15.791) 83.684,16.602 89.912,16.602 91.749,14.765 v1(91.749,12.758)
AD_KEY: R13.2 R14.1 R15.2 R18.2 R19.2 R20.2 U1.12 | length 44.2
  Top Layer w0.254: R20.2@63.266,10.401 63.28,10.415 64.303,10.415 R19.2@64.317,10.428 64.332,10.414 68.467,10.414 R13.2@68.482,10.399 68.497,10.384 68.497,9.768 v1(69.541,8.724) ; U1.12@88.044,18.282 89.272,18.282 89.953,17.601 91.492,17.601 v1(91.67,17.779) ; v1(93.031,9.607) v1(93.031,12.42)
  Bottom Layer w0.254: v1(69.541,8.724) 69.852,8.413 91.838,8.413 v1(93.031,9.607) ; v1(91.67,17.779) 91.67,15.344 93.031,13.983 v1(93.031,12.42)
AGND: C6.2 C11.1 J1.4 R6.2 U1.1 | length 73
  Top Layer w0.254: R6.2@15.73,14.832 J1.4@18.414,14.832 ; C11.1@81.8,16.335 81.802,16.333 81.802,15.109 C6.2@81.805,15.107
  Top Layer w0.3: 24.6,12.204 32.54,12.204 34.911,14.575 64.198,14.575
  Top Layer w0.35: 23.279,13.524 24.6,12.204
  Top Layer w0.4: v1(22.097,14.707) 23.279,13.524 ; 64.249,14.626 69.56,14.626 70.394,13.792 79.175,13.792 80.49,15.107 C6.2@81.805,15.107 ; C6.2@81.805,15.102 83.609,15.102 84.494,15.986 U1.1@84.494,16.332
  Bottom Layer w0.4: J1.4@18.981,14.707 v1(22.097,14.707)
AUX-DET: R12.2 U1.8 | length 31.9
  Top Layer w0.254: R12.2@60.815,10.395 61.887,10.395 62.794,11.302 64.454,11.302 v1(64.7,11.548) ; v1(73.867,9.534) 82.547,9.534 87.294,14.28 U1.8@87.294,16.332
  Bottom Layer w0.254: v1(64.7,11.548) 65.613,10.635 66.936,10.635 68.119,9.452 73.786,9.452 v1(73.867,9.534)
BT-ANT: R34.1 R35.1 U1.17 | length 8.3
  Top Layer w0.254: 87.431,20.495 87.431,21.409 cw(c89.971,21.409) 89.971,23.949 R35.1@92.256,23.949 ; R35.1@92.254,23.952 R35.1@92.256,23.949 ; R34.1@92.262,25.053 92.259,25.051 92.259,23.952 R35.1@92.256,23.949
CS: R11.2 U1.30 | length 13.9
  Top Layer w0.254: v1(73.586,20.22) 74.527,20.22 R11.2@74.641,20.334 ; v1(75.946,16.724) 78.473,16.724 79.631,17.882 U1.30@83.744,17.882
  Bottom Layer w0.254: v1(73.586,20.22) 73.586,19.378 75.946,17.018 v1(75.946,16.724)
CTR: R8.2 R9.2 R11.1 U2.8 U4.8 | length 58.8
  Top Layer w0.254: U2.8@49.456,26.17 49.482,26.197 50.737,26.197 52.01,27.47 v1@53.201,27.47 ; U4.8@58.726,27.6 U4.8@59.4,27.6 ; U4.8@59.334,27.534 59.373,27.573 59.562,27.384 v1(59.562,26.679) ; R11.1@75.64,20.334 75.67,20.304 76.564,20.304 v1(76.594,20.274) ; R8.2@92.397,18.617 92.456,18.557 92.456,17.871 v1(92.515,17.812) ; R8.2@92.416,18.814 92.451,18.848 92.451,19.859 R9.2@92.485,19.894
  Bottom Layer w0.254: 52.615,27.47 53.222,27.47 56.465,27.47 57.256,26.679 v1(59.562,26.679) 61.399,24.842 68.934,24.842 69.586,25.493 79.099,25.493 80.466,24.127 ; v1@76.594,20.255 80.466,24.127 ; v1@92.456,17.871 91.986,18.341 86.251,18.341 80.466,24.127
  other v1: 53.222,27.464
DACL: SR1.5 U1.3 | length 85.1
  Top Layer w0.2: 84.55,14.558 84.68,14.558 85.294,15.172 U1.3@85.294,16.332
  Top Layer w0.254: SR1.5@8.14,5.162 SR1.5@8.169,5.191 ; v1@8.169,7.305 v1(8.197,7.333)
  Top Layer w0.34: SR1.5@8.169,5.191 v1@8.169,7.305
  Top Layer w0.4: v1@34.452,13.344 35.07,13.962 69.363,13.962 ; 69.363,13.927 70.111,13.179 83.171,13.179 84.55,14.558
  Bottom Layer w0.4: v1(8.197,7.333) 8.197,8.416 11.464,11.683 18.526,11.683 19.249,12.407 19.438,12.595 33.701,12.595 v1@34.528,13.422
  other v1: 34.439,13.357
DACR: C8.1 U1.4 | length 6.2
  Top Layer w0.3: C8.1@81.97,12.441 83.324,12.441 85.693,14.81 U1.4@85.693,16.332
FM-ANT: BR3.1 C25.1 C27.2 U1.16 | length 5.1
  Top Layer w0.254: C27.2@90.844,21.014 ccw(c90.917,21.014) C27.2@90.917,20.941 ; C25.1@93.216,20.955 C25.1@93.271,21.009
  Top Layer w0.3: U1.16@88.044,19.882 88.668,19.882 ccw(c88.668,22.422) 90.464,20.626 C27.2@90.798,20.96 ; C27.2@91.012,20.995 91.757,20.995 ; BR3.1@92.181,20.955 C25.1@93.216,20.955
FM-PWR: C25.2 FM1.1 U3.8 | length 121.5
  Top Layer w0.3: U3.8@23.14,1.52 26.935,1.52 28.096,0.359 31.99,0.359 32.805,1.175 76.812,1.175 77.366,1.728 ; C25.2@94.271,21.009 96.08,21.009 103.891,21.009 103.891,19.443 97.645,19.443 97.645,17.504 103.888,17.504 103.888,15.441 97.659,15.441 97.659,13.654 99.606,13.654 99.606,11.775 FM1.1@99.568,11.775
  Bottom Layer w0.3: 77.366,1.728 90.674,1.728 99.598,10.652 FM1.1@99.598,11.378
GND: BR3.2 C2.1 C4.1 C5.2 C7.2 C9.1 C10.1 C12.1 C13.1 C16.2 C17.1 C18.1 C21.2 C22.1 C23.1 C27.1 CAP1.1 CAP2.1 CAP3.1 CAP4.2 CAP5.1 CAP6.1 CAP7.1 D5.2 D6.2 D7.2 D8.2 FM1.2 H1.4 h4.2 h5.2 h6.2 H7.1 IR1.2 pad.1@99.887,25.07 PJ1.4 R3.1 R4.1 R6.1 R9.1 R21.1 R35.2 S1.2 S2.2 S3.1 S4.2 SR1.3 SW1.3 SW2.3 T1.2 TF1.6 TF1.10 TF1.13 TF1.14 TF1.15 U3.1 U5.2 USB1.1 USB1.5 USB1.6 USB1.7 USB1.8 Y2.2 Y2.4 | length 1.2
  Top Layer w0.9: 90.204,28.588 90.204,29.124 90.204,29.755
  other v1: 45.549,2.67 43.856,2.686 49.34,2.7 16.357,3.254 17.89,3.254 19.3,3.254 20.571,3.254 92.988,7.093 27.667,7.538 93.992,7.987 26.46,8.435 27.678,8.502 95.078,8.991 26.465,9.204 85.342,9.701 86.381,9.696 84.094,9.725 85.371,10.643 86.408,10.676 86.446,11.718 5.478,11.958 94.063,12.482 67.797,12.812 14.472,13.063 14.413,13.959 22.124,15.733 28.139,15.9 93.911,16.721 7.811,17.202 93.903,17.553 53.363,21.53 51.891,21.562 25.288,22.515 27.167,22.515 29.02,22.515 84.966,24.292 96.49,27.859 101.615,27.878 99.098,27.915 103.853,27.937 91.336,28.18 85.72,28.355 86.411,28.361 86.405,29.055 66.728,32.756 86.538,33.839 64.452,34.452
INN: C15.2 C20.2 SR1.4 | length 70.8
  Top Layer w0.254: SR1.4@5.64,5.162 5.64,6.652 v1(6.618,7.63) ; v1(34.951,17.583) 39.874,17.583 42.837,20.546 ; 42.837,20.555 56.673,20.555 ; C15.2@55.661,24.884 56.638,23.906 56.638,20.639 ccw(c56.757,20.639) 56.673,20.555 ; C20.2@61.512,24.805 61.512,22.812 59.255,20.555 56.673,20.555
  Bottom Layer w0.254: v1(6.618,7.63) 16.57,17.583 v1(34.951,17.583)